# Altium PCB MainBoard_PCB.PcbDoc
Units mil, origin at the board's own origin, x right, y up, seen from the top; angles counter-clockwise.
Board outline 3040 x 1640 mil, 2 copper layers (Top Layer, Bottom Layer); 42 components, 30 nets, 152 pads, 1 vias.
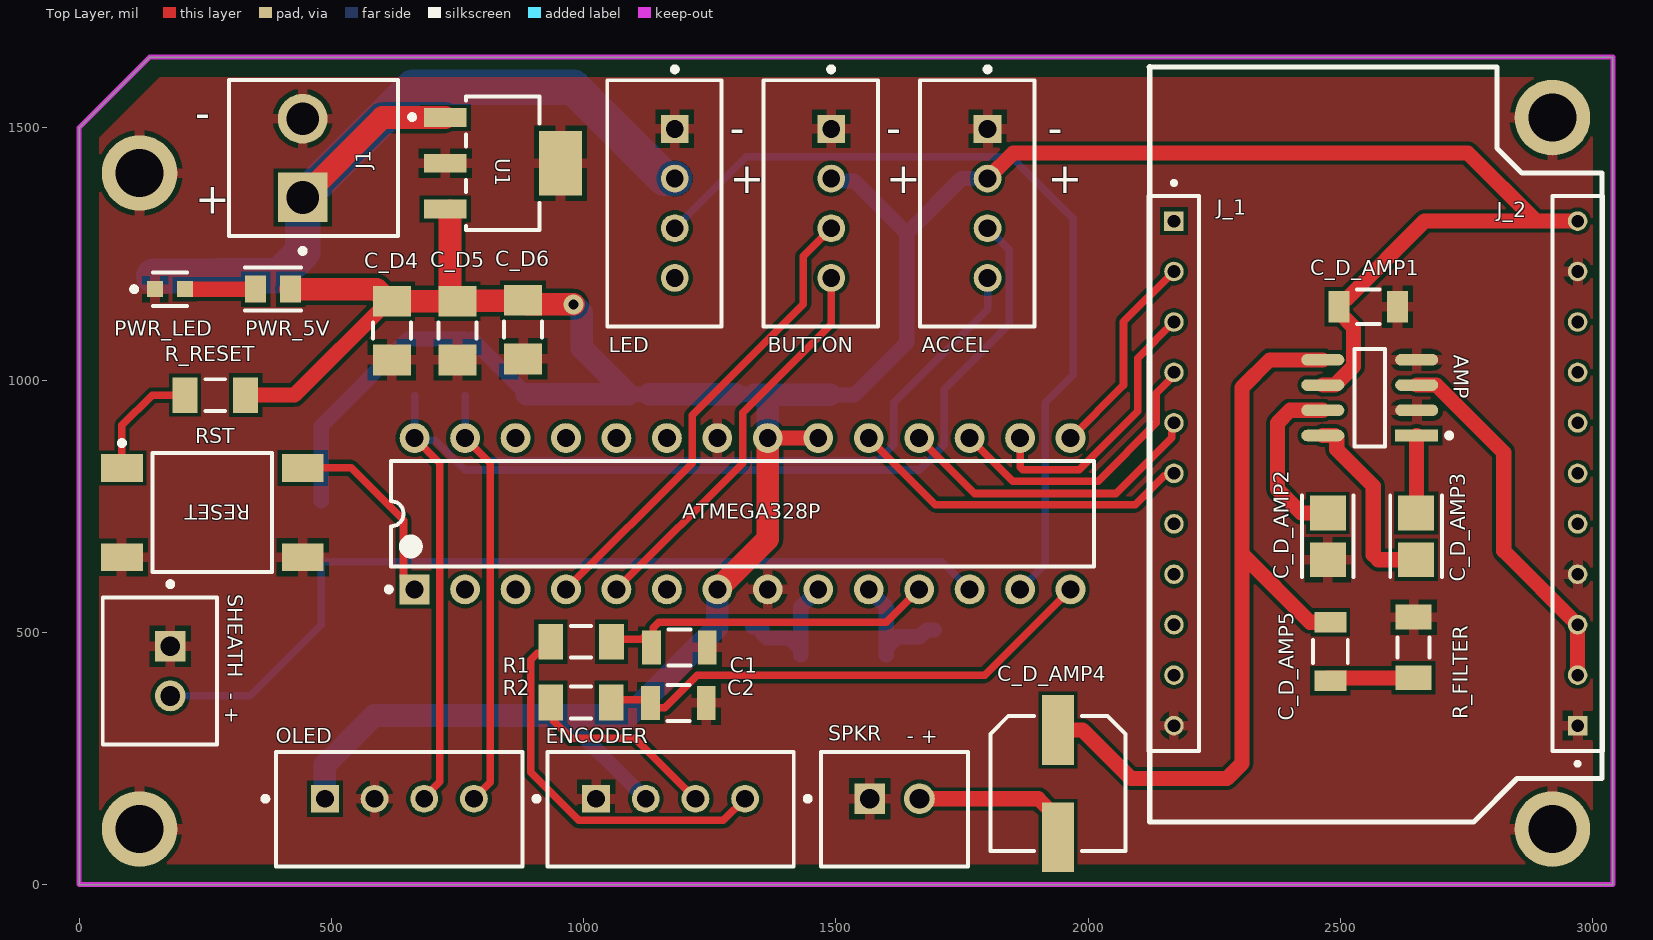
[diagram p0: Top Layer view]
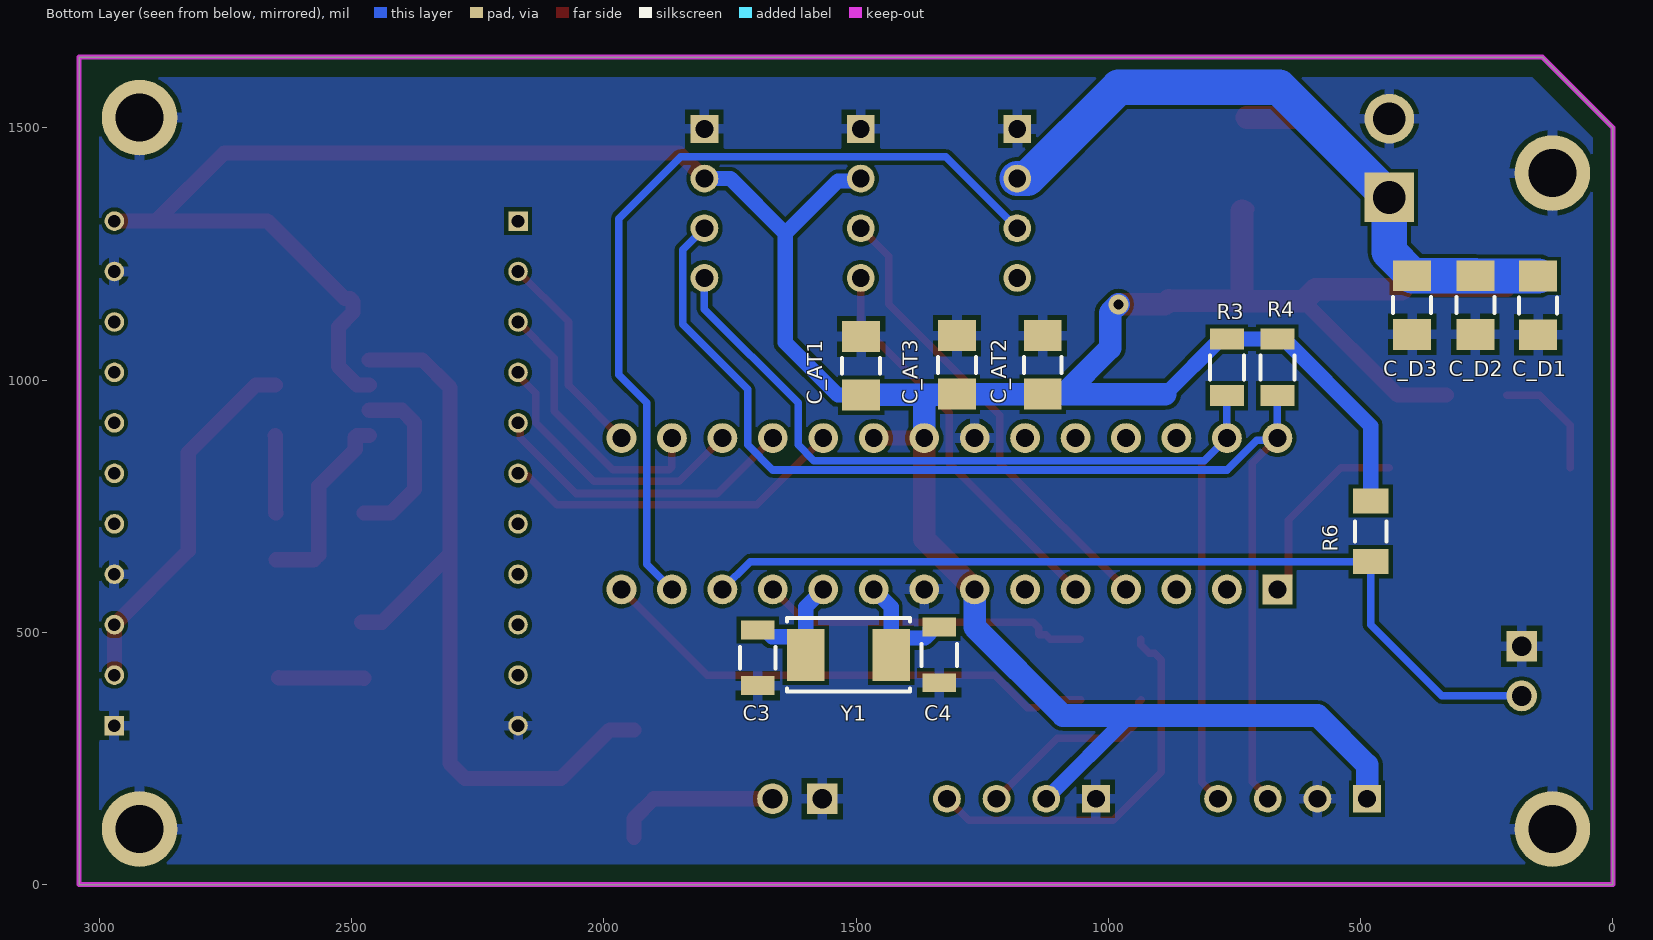
[diagram p1: Bottom Layer view, seen from below]
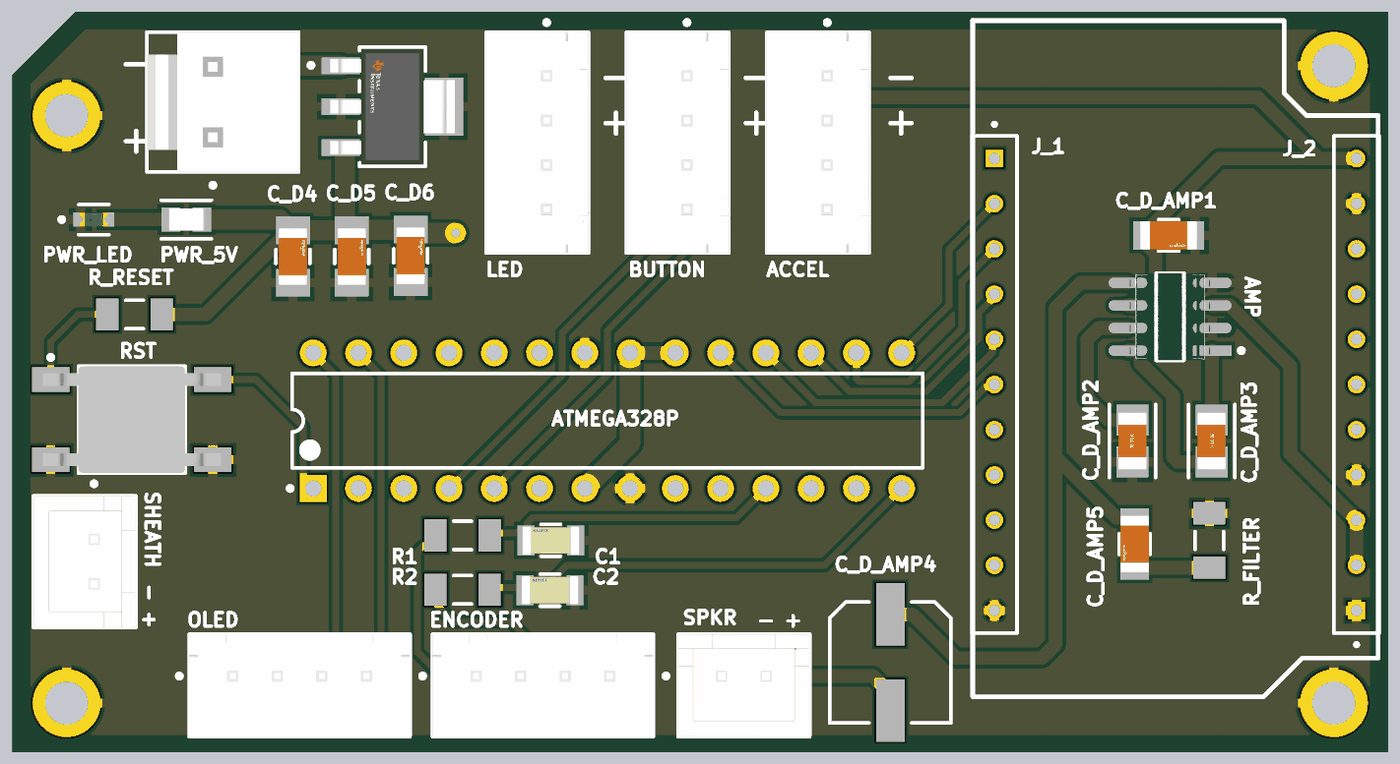
[diagram p2: 3D render of the assembled board from above, using the file's embedded part models]
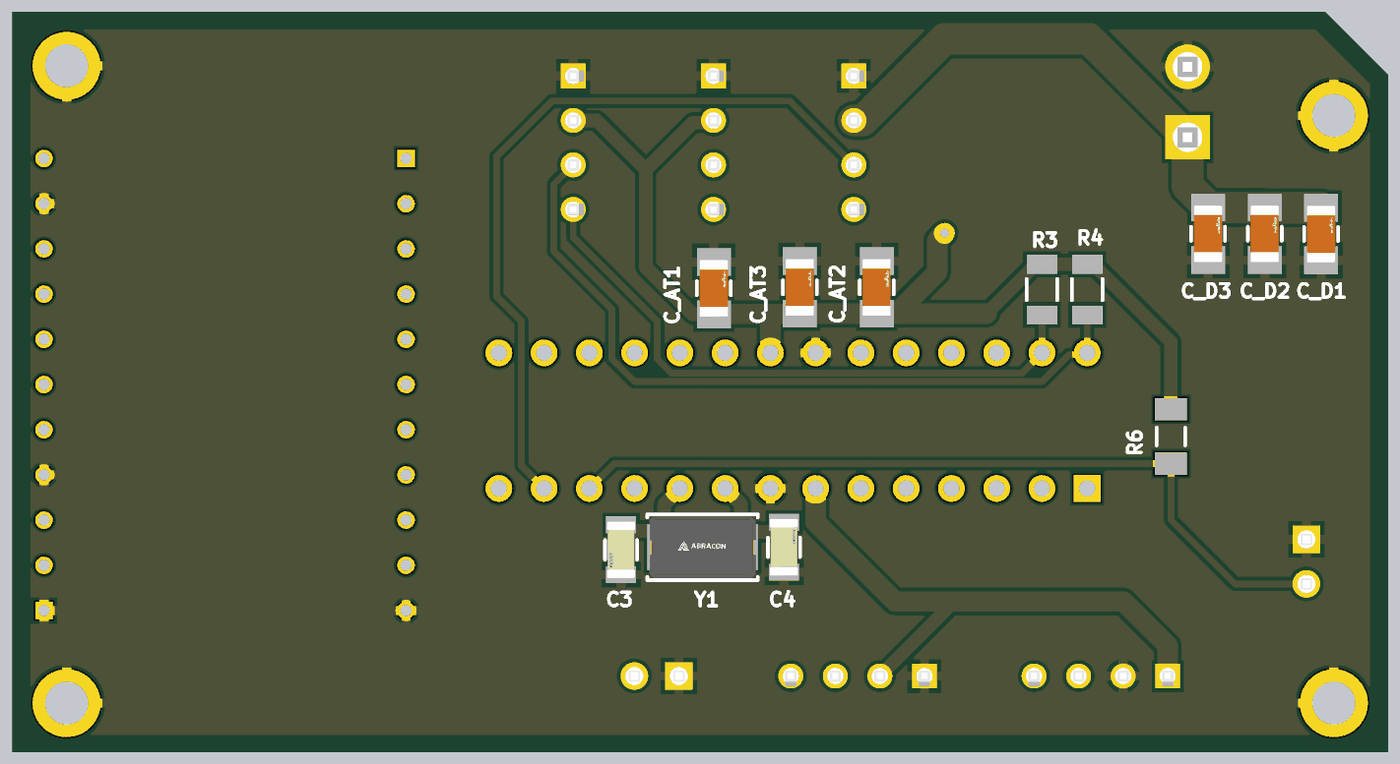
[diagram p3: 3D render of the assembled board from below, using the file's embedded part models]

## Layer stack, top to bottom
Top Solder: solder mask 0.4, Solder Resist, Dk 3.5
Top Layer: signal copper 1.4
Dielectric 1: dielectric 12.6, FR-4, Dk 4.8
Bottom Layer: signal copper 1.4
Bottom Solder: solder mask 0.4, Solder Resist, Dk 3.5

## Board outline
0,1500 140,1640 3040,1640 3040,0 0,0

## Design rules (kind name [scope] priority, off if disabled: settings)
BoardOutlineClearance [All] p1: gap=11.81 ignorepadtopadclearanceinfootprint=FALSE except(15.75: Arc-SplitBarrior Arc-SplitContinuation Track-SplitBarrior Track-SplitContinuation SMDPad-SplitBarrior SMDPad-SplitContinuation THPad-SplitBarrior THPad-SplitContinuation Via-SplitBarrior Via-SplitContinuation Fill-SplitBarrior Fill-SplitContinuation Poly-SplitBarrior Poly-SplitContinuation Region-SplitBarrior Region-SplitContinuation Text-SplitBarrior Text-SplitContinuation)
Clearance "Clearance Different Nets" [All] p1: gap=7.87 ignorepadtopadclearanceinfootprint=FALSE except(3.5: Arc-Arc Arc-Track Arc-SMDPad Track-Track Track-SMDPad; 5: SMDPad-SMDPad SMDPad-Via THPad-Via Via-Via; 10: Arc-Via Arc-Text Track-Via Track-Text SMDPad-Text THPad-Text Via-Text Fill-Text Poly-Text Region-Text Text-Text; 19.68: THPad-THPad Via-Hole)
Clearance "Clearance Same Nets" [All] p2: gap=7.87 ignorepadtopadclearanceinfootprint=FALSE except(3.5: Arc-Arc Arc-Track Arc-SMDPad Track-Track Track-SMDPad SMDPad-SMDPad; 5: SMDPad-Via THPad-Via; 10: Arc-Via Arc-Text Track-Via Track-Text SMDPad-Text THPad-Text Via-Via Via-Text Fill-Text Poly-Text Region-Text Text-Text)
Clearance "Clearance Bottom Layer" [OnLayer('Bottom Layer')] p3: gap=8 ignorepadtopadclearanceinfootprint=TRUE except(10: Arc-Text Track-Text SMDPad-Text THPad-Text Via-Text Fill-Text Poly-Text Region-Text Text-Text)
Clearance "Clearance Top Layer" [OnLayer('Top Layer')] p4: gap=8 ignorepadtopadclearanceinfootprint=TRUE except(10: Arc-Text Track-Text SMDPad-Text THPad-Text Via-Text Fill-Text Poly-Text Region-Text Text-Text)
HoleSize [All] p1: absolutevalues=TRUE maxlimit=248.03 minlimit=7.87 maxpercent=80.000 minpercent=20.000
MinimumAnnularRing [All] p1: minimumring=5.12
MinimumSolderMaskSliver [All] p1: minsoldermaskwidth=3.94
PolygonConnect PolygonConnect_1 [All] p1: thpad.connectstyle=Relief thpad.reliefconductorwidth=20 thpad.reliefentries=4 thpad.polygonreliefangle="90 Angle" thpad.airgapwidth=10 smdpad.connectstyle=Relief smdpad.reliefconductorwidth=20 smdpad.reliefentries=4 smdpad.polygonreliefangle="90 Angle" smdpad.airgapwidth=10 via.connectstyle=Direct via.reliefconductorwidth=20 via.reliefentries=4 via.polygonreliefangle="90 Angle" via.airgapwidth=10
RoutingCorners [All] p1: cornerstyle=Round minsetback=100 maxsetback=100
RoutingVias [All] p1: holewidth=19.68 width=39.37 viastyle="Through Hole" minholewidth=7.87 minwidth=13.78 maxholewidth=39.37 maxwidth=78.74
SilkToSilkClearance [All] p1: silktosilkclearance=3.94
SilkToSolderMaskClearance [IsPad] p1: minsilkscreentomaskgap=3.94 clearancetoexposedcopper=TRUE
SolderMaskExpansion [All] p1: expansion=4 istentingtop=FALSE
SupplyNets "Schematic Supply Nets_2" [InNet('GND')] p1: voltage=0.000
SupplyNets "Schematic Supply Nets_1" [InNet('VCC')] p2: voltage=0.000
SupplyNets "Schematic Supply Nets" [InNet('+5')] p3: voltage=0.000
Width [All] p1: maxlimit=100 minlimit=3.5 preferedwidth=15
25 further rules are at their usual default settings.

## Components (designator, comment, footprint, x,y, rotation, side; value= is the part's Value field where it differs from the comment)
ACCEL "B4B-XH-A(LF)(SN)" FP-B4B-XH-A_LF_SN-MFG 1780,1350 r90 top
AMP "LM386MX-1/NOPB" FP-D0008A-IPC_B 2558.06,965 r180 top
ATMEGA328P "ATmega328-PU" 28P3 1315,735 r90 top
BUTTON "B4B-XH-A(LF)(SN)" FP-B4B-XH-A_LF_SN-MFG 1470,1350 r90 top
C1 "C1206C103K5RACTU" FP-C1206C-EB-MFG 1189.88,470 r0 top value="10,000 pF"
C2 "C1206C103K5RACTU" FP-C1206C-EB-MFG 1187.92,359.99 r0 top value="10,000 pF"
C3 "C1206C220F1HACAUTO" FP-C1206C-EB-MFG 1695,449.4 r90 bottom value="22 pF"
C4 "C1206C220F1HACAUTO" FP-C1206C-EB-MFG 1335,455 r270 bottom value="22 pF"
C_AT1 "GRT31CR61H106KE01L" FP-GRT31C-0_2-IPC_A 1490,1028.1 r90 bottom
C_AT2 "GRM31CR71H105KA61L" FP-GRT31C-0_2-IPC_A 1130,1030 r90 bottom
C_AT3 "GRM31C5C1H104JA01K" FP-GRT31C-0_2-IPC_A 1300,1030 r90 bottom
C_D1 "GRT31CR61H106KE01L" FP-GRT31C-0_2-IPC_A 148.14,1147.87 r90 bottom
C_D2 "GRM31CR71H105KA61L" FP-GRT31C-0_2-IPC_A 272.55,1148.49 r90 bottom
C_D3 "GRM31C5C1H104JA01K" FP-GRT31C-0_2-IPC_A 397.88,1148.49 r90 bottom
C_D4 "GRT31CR61H106KE01L" FP-GRT31C-0_2-IPC_A 620,1098.1 r90 top
C_D5 "GRM31CR71H105KA61L" FP-GRT31C-0_2-IPC_A 750,1098.1 r90 top
C_D6 "GRM31C5C1H104JA01K" FP-GRT31C-0_2-IPC_A 880,1100 r90 top
C_D_AMP1 "12061C503JAT2A" FP-GRM319-0_15-MFG 2555,1145 r0 top
C_D_AMP2 "C3216X7R1C106K160AC" FP-C3216-160-0_2-IPC_B 2475,690 r90 top
C_D_AMP3 "C3216X7R1C106K160AC" FP-C3216-160-0_2-IPC_B 2650,690 r270 top
C_D_AMP4 "UUD1C221MCL1GS" NIC-CAPA2-6.3X7.7_V 1940,200 r270 top
C_D_AMP5 "12061C503JAT2A" FP-GRM319-0_15-MFG 2480,461.93 r270 top
ENCODER "B4B-XH-A(LF)(SN)" FP-B4B-XH-A_LF_SN-MFG 1172.36,149.33 r180 top
J1 "B2P-VH-B(LF)(SN)" FP-B2P-VH-B_LF_SN-MFG 464.84,1439.92 r90 top
J_1 "TS-111-T-A" SAMTEC_TS-111-T-A 2170,815 r270 top
J_2 "TS-111-T-A" SAMTEC_TS-111-T-A 2970,815 r90 top
LED "B4B-XH-A(LF)(SN)" FP-B4B-XH-A_LF_SN-MFG 1160,1350 r90 top
OLED "B4B-XH-A(LF)(SN)" FP-B4B-XH-A_LF_SN-MFG 634.8,149.33 r180 top
PWR_5V "CR0805-JW-331ELF" FP-CR0805-IPC_B 384.53,1180 r0 top
PWR_LED "LTST-C190GKT" FP-LTST-C190GKT-MFG 180,1180 r0 top
R1 "RC1206FR-0710KL" RESC3116X65X40ML10T20 994.85,360.89 r0 top
R2 "RC1206FR-0710KL" RESC3116X65X40ML10T20 994.97,481.12 r0 top
R3 "RC1206FR-074K7L" FP-RC1206-0_65-IPC_B 765,1025 r90 bottom
R4 "RC1206FR-074K7L" FP-RC1206-0_65-IPC_B 665,1025 r90 bottom
R6 "RC1206FR-0710KL" RESC3116X65X40ML10T20 480,700 r270 bottom
R_FILTER "RC1206FR-0710RL" RESC3116X65X40ML10T20 2645,470.04 r90 top
R_RESET "RC1206FR-0710KL" RESC3116X65X40ML10T20 270,970 r0 top
RESET "FSM4JSMATR" TECO-FSM4JSMATR_V 264.02,737.24 r90 top
SHEATH "B2B-XH-A(LF)(SN)" FP-B2B-XH-A_LF_SN-MFG 160.05,423.11 r270 top
SPKR "B2B-XH-A(LF)(SN)" FP-B2B-XH-A_LF_SN-MFG 1616.42,149.33 r0 top
U1 "LM7805MP/NOPB" FP-DCY0004A-MFG 840,1429.6 r0 top
Y1 "ABM7-16.000MHZ-D2Y-T" FP-ABM7-MFG 1515,455 r180 bottom

## Footprints (in the part's own frame and the unit in brackets; to place one, negate y for a bottom-side part, rotate by r counter-clockwise, add the part's x,y. Pads: shape width x height; smd on the part's side, far side on the other; paste and mask are expansions set on the pad)
28P3 [mm] "28-Pin Plastic Dual In-Line Package (PDIP)"
  rect 1.5x1.5 hole 0.9: 1(-3.81,16.51)
  round 1.5 hole 0.9: 2(-3.81,13.97) 3(-3.81,11.43) 4(-3.81,8.89) 5(-3.81,6.35) 6(-3.81,3.81) 7(-3.81,1.27) 8(-3.81,-1.27) 9(-3.81,-3.81) 10(-3.81,-6.35) 11(-3.81,-8.89) 12(-3.81,-11.43) 13(-3.81,-13.97) 14(-3.81,-16.51) 15(3.81,-16.51) 16(3.81,-13.97) 17(3.81,-11.43) 18(3.81,-8.89) 19(3.81,-6.35) 20(3.81,-3.81) 21(3.81,-1.27) 22(3.81,1.27) 23(3.81,3.81) 24(3.81,6.35) 25(3.81,8.89) 26(3.81,11.43) 27(3.81,13.97) 28(3.81,16.51)
  silkscreen extent -3.93,-17.7 2.65,17.93, body extent -3.6,-17.65 3.6,17.65, height 4.58
FP-ABM7-MFG [mm]
  rect 1.9x2.6 smd paste+0 mask+0: 1(-2.15,0) 2(2.15,0)
  silkscreen extent -3.1,-1.85 3.1,1.85, body extent -3,-1.75 3,1.75, height 1.4
FP-B2B-XH-A_LF_SN-MFG [mm]
  rect 1.55x1.55 hole 1 paste-2539.97 mask+0: 1(-1.25,0.525)
  round 1.55 hole 1 paste-2539.97 mask+0: 2(1.25,0.525)
  silkscreen extent -4.5,-2.88 3.7,2.88, body extent -3.8,-2.98 3.8,2.98, height 0.25
FP-B2P-VH-B_LF_SN-MFG [mm]
  rect 2.5x2.5 hole 1.65 paste-2539.97 mask+0: 1(-1.98,0.55)
  round 2.5 hole 1.65 paste-2539.97 mask+0: 2(1.98,0.55)
  silkscreen extent -4.8,-4.25 3.93,4.25, body extent -4.03,-4.35 4.03,4.35, height 0.25
FP-B4B-XH-A_LF_SN-MFG [mm]
  rect 1.4x1.4 hole 0.9 paste-2539.97 mask+0: 1(3.75,-0.525)
  round 1.4 hole 0.9 paste-2539.97 mask+0: 2(1.25,-0.525) 3(-1.25,-0.525) 4(-3.75,-0.525)
  silkscreen extent -6.2,-2.88 6.87,2.88, body extent -6.3,-2.98 6.3,2.98, height 0.25
FP-C1206C-EB-MFG [mm]
  rect 0.95x1.7 smd paste+0 mask+0: 1(-1.4,0) 2(1.4,0)
  silkscreen extent -0.55,-0.9 0.55,0.9, body extent -1.6,-0.8 1.6,0.8, height 0.88
FP-C3216-160-0_2-IPC_B [mil]
  rect 69.05x71.11 smd paste+0 mask+0: 1(-46.3,0) 2(46.3,0)
  silkscreen extent -81,-51 81,51, body extent -91,-45 91,45, height 10
FP-CR0805-IPC_B [mil]
  rect 41.66x53.63 smd paste+0 mask+0: 1(-34.53,0) 2(34.53,0)
  silkscreen extent -55,-43 55,43, body extent -65,-37 65,37, height 10
FP-D0008A-IPC_B [mil]
  rect 85.4x22.92 smd paste+0 mask+0: 1(-93.06,75)
  rrect100% 85.4x22.92 smd paste+0 mask+0: 2(-93.06,25) 3(-93.06,-25) 4(-93.06,-75) 5(93.06,-75) 6(93.06,-25) 7(93.06,25) 8(93.06,75)
  silkscreen extent -162,-97 31,97, body extent -146,-106 146,106, height 10
FP-DCY0004A-MFG [mm]
  rect 2.15x0.95 smd paste+0 mask+0: 1(-2.9,2.3) 2(-2.9,0) 3(-2.9,-2.3)
  rect 2.15x3.25 smd paste+0 mask+0: 4(2.9,0)
  silkscreen extent -4.7,-3.35 1.85,3.35, body extent -4.08,-3.45 4.08,3.45, height 0.25
FP-GRM319-0_15-MFG [mm]
  rect 1.05x1.6 smd paste+0 mask+0: 1(-1.475,0) 2(1.475,0)
  silkscreen extent -0.58,-0.87 0.58,0.87, body extent -2.1,-0.97 2.1,0.97, height 0.25
FP-GRT31C-0_2-IPC_A [mil]
  rect 61.21x75.05 smd paste+0 mask+0: 1(-58.1,0) 2(58.1,0)
  silkscreen extent -16,-38 16,38, body extent -63,-31 63,31, height 71
FP-LTST-C190GKT-MFG [mm]
  rect 0.8x0.8 smd paste+0 mask+0: 1(-0.75,0) 2(0.75,0)
  silkscreen extent -1.92,-0.85 0.85,0.85, body extent -1.25,-0.55 1.25,0.55, height 0.25
FP-RC1206-0_65-IPC_B [mil]
  rect 41.66x67.41 smd paste+0 mask+0: 1(-56.18,0) 2(56.18,0)
  silkscreen extent -24,-34 24,34
NIC-CAPA2-6.3X7.7_V [mm] "Aluminum Electrolytic Capacitor, Diameter 6.3mm, Height 8mm, Pitch 5.4mm"
  rect 3.5x1.6 smd: 1(-2.7,0) 2(2.7,0)
  silkscreen extent -3.4,-3.4 3.4,3.4, body extent -3.14,-3.12 3.14,3.15, height 8
RESC3116X65X40ML10T20 [mm] "Chip Resistor, 2-Leads, Body 3.10x1.60mm, IPC Low Density"
  rect 1.25x1.8 smd: 1(-1.525,0) 2(1.525,0)
  silkscreen extent -0.5,-0.8 0.5,0.8, body extent -1.6,-0.85 1.6,0.85, height 0.65
SAMTEC_TS-111-T-A [mm]
  rect 0.985x0.985 / inner round 0.985 / far side rect 0.985x0.985 hole 0.635: 01(-12.7,0)
  round 0.985 hole 0.635: 02(-10.16,0) 03(-7.62,0) 04(-5.08,0) 05(-2.54,0) 06(0,0) 07(2.54,0) 08(5.08,0) 09(7.62,0) 10(10.16,0) 11(12.7,0)
  silkscreen extent -14.72,-1.27 13.97,1.27
TECO-FSM4JSMATR_V [mm] "SMD, 4-Leads, Body 6x6mm, Pitch 4.5mm"
  rect 1.4x2.1 smd: 1(2.25,4.55) 2(2.25,-4.55) 3(-2.25,4.55) 4(-2.25,-4.55)
  silkscreen extent -3,-3 3.62,4.67, body extent -3,-5 3,5, height 5.08

## Part data
ACCEL BUTTON ENCODER LED OLED: library part CMP-17439-000250-1, "CONN HEADER VERT 4POS 2.5MM", Color=Natural, Contact Resistance=20mR, Current Rating=3A, Flammability Rating="UL94 V-0", Housing Color=White, Insulation Resistance=1GR, Max Operating Temperature=85°C, Max Voltage Rating (AC)=250V, Min Operating Temperature=-25°C, Package Quantity=500, Connector Type=Header, Contact Finish - Mating=TIN, Contact Material=Brass, Contact Plating=Tin, Contact Shape=Square, Contact Type="Male Pin", Depth=5.75mm, Fastening Type=Detent, Gender=Male, Housing Material=Polyamide, Insulation Color=Natural, Insulation Material=Nylon, Lead Free="Lead Free", Lead Pitch=2.5mm, Length=12.4mm, Mated Stacking Heights=9.8mm, Material=Polyamide, Max Current Rating=3A, Max Voltage Rating (DC)=250V, Mount="Through Hole", Number of Contacts=4, Number of Positions=4, Number of Rows=1, Orientation=Straight, Packaging=Bulk, Pitch=2.5mm, REACH SVHC="No SVHC", Series=XH, Termination=Solder, Voltage Rating=250V, Voltage Rating (AC)=250V, Wire/Cable Gauge=22AWG
AMP: library part CMP-0994-00003-2, "IC AMP CLASS AB MONO 325MW 8SOIC", Case/Package=D, Input Bias Current=250nA, Max Operating Temperature=70°C, Max Output Power=325mW, Max Power Dissipation=730mW, Max Supply Voltage=12V, Min Operating Temperature=0°C, Min Supply Voltage=4V, Nominal Supply Current=4mA, Operating Supply Voltage=9V, Package Quantity=2500, Power Supply Rejection Ratio (PSRR)=50dB, Voltage Gain=46dB, Bandwidth=300kHz, Contact Plating=Tin, Gain=20dB, Lead Free="Lead Free", Load Impedance=8R, Number of Channels=1, Number of Pins=8, Output Power=325mW, Packaging="Tape and Reel", Power Dissipation=730mW, Radiation Hardening=No, REACH SVHC="No SVHC", RoHS Compliant=Yes, Series=LM386, Supply Current=4mA, Supply Type=Single
ATMEGA328P: library part CMP-0095-00015-2, "8-bit AVR Microcontroller, 32KB Flash, 1KB EEPROM, 2KB SRAM, 28-pin PDIP, Industrial Grade (-40°C to 85°C)", ComponentLink1Description="Manufacturer URL", ComponentLink1URL=http://www.atmel.com/, ComponentLink2Description="ATmega48A/48PA/88A/88PA/168A/168PA/328/328P Datasheet", ComponentLink2URL=http://www.atmel.com/dyn/resources/prod_documents/8271.pdf, ComponentLink3Description="ATmega48A/48PA/88A/88PA/168A/168PA/328/328P Summary", ComponentLink3URL=http://www.atmel.com/dyn/resources/prod_documents/8271S.pdf, DatasheetVersion="revD, May-2011", PackageDescription="28-lead (0.300\"/7.62mm Wide) Plastic Dual Inline Package (PDIP)", PackageReference=28P3, PackageVersion="revB, Sep-2001", RevisionNote="DatasheetVersion updated. URLs added."
C1 C2: library part CMP-2000-06008-2, "CAP CER 10000PF 50V X7R 1206", Capacitance="10,000 pF", Manufacturer=KEMET, Package=C1206C-EB, Temperature="-55°C to +150°C", Temperature Characteristic=X7R, Temperature Coefficient=15%, Temperature Range High=+150°C, Temperature Range Low=-55°C, Tolerance=0.1, Voltage Rating="50 V", Automotive=Yes, Automotive Grade="Grade 0", Category=Cap, ComponentLink2Description=Datasheet, ComponentLink2URL=https://content.kemet.com/datasheets/KEM_C1007_X8R_ULTRA_150C_SMD.pdf, Device Class L1="Passive Components", Device Class L2=Capacitors, Device Class L3="Ceramic Capacitors", Digikey Description="CAP CER 10000PF 50V X7R 1206", Height=0.88mm, Ipc Land Pattern Name=CAPC320160X78, Lead Free=Yes, Manufacturer Part Number=C1206C103K5RACTU, Material=Ceramic, Mouser Description="Multilayer Ceramic Capacitors MLCC - SMD/SMT 50volts 10000pF X7R 10%", Octopart=https://octopart.com/c1206c103k5ractu-kemet-130245, RoHS=TRUE
C3 C4: library part CMP-03020-023717-1, "C1206 22 pF X8R 1.00% 100 V", Capacitance="22 pF", Manufacturer=KEMET, Package=C1206C-EB, Temperature="-55°C to +150°C", Temperature Characteristic=X8R, Temperature Coefficient=15%, Temperature Range High=+150°C, Temperature Range Low=-55°C, Tolerance=0.01, Voltage Rating="100 V", Automotive=Yes, Automotive Grade="Grade 0", Category=Cap, ComponentLink2Description=Datasheet, ComponentLink2URL=https://content.kemet.com/datasheets/KEM_C1007_X8R_ULTRA_150C_SMD.pdf, Device Class L1="Passive Components", Device Class L2=Capacitors, Device Class L3="Ceramic Capacitors", Height=0.88mm, Ipc Land Pattern Name=CAPC320160X78, Lead Free=Yes, Manufacturer Part Number=C1206C220F1HACAUTO, Material=Ceramic, Octopart=https://octopart.com/c1206c220f1hacauto-kemet-88102108, RoHS=TRUE
C_AT1 C_AT2 C_AT3 C_D1 C_D2 C_D3 C_D4 C_D5 C_D6: library part CMP-06035-000076-2, "Multi-Layer Ceramic Capacitor 10uF 50V X5R ±10% 1206 Emboss T/R", Capacitance=10uF, Case Code (Imperial)=1206, Case Code (Metric)=3216, Dielectric=X5R, Max Operating Temperature=85°C, Min Operating Temperature=-55°C, Ratings=AEC-Q200, Tolerance=10%, Voltage Rating=50V, Case/Package=1206, Length=0.126inch, Mount="Surface Mount", Packaging="Cut Tape", Thickness=0.071inch, Voltage Rating (DC)=50V, Width=0.063inch
C_D_AMP1: library part CMP-06035-028588-1, "Chip Multilayer Ceramic Capacitors for General Purpose, 1206, 0.05uF, C0G, 30ppm/°C, 5%, 50V"
C_D_AMP2 C_D_AMP3: library part CMP-08246-002980-1, "Multilayer Ceramic Capacitors 10uF ±10% 16V X7R SMD 1206", Capacitance=10uF, Case Code (Imperial)=1206, Case Code (Metric)=3216, Dielectric=X7R, Dielectric Material=Ceramic, Max Operating Temperature=125°C, Min Operating Temperature=-55°C, Package Quantity=1, Tolerance=10%, Voltage=16V, Case/Package=1206, Construction=Flat, Depth=1.6mm, Height=1.6mm, Lead Free="Lead Free", Length=3.2mm, Mount="Surface Mount", Number of Pins=2, Packaging="Tape and Reel", REACH SVHC="No SVHC", Resistor Type=Ceramic, RoHS Compliant=Yes, Series=C, Termination=SMD/SMT, Thickness=0.071inch, Voltage Rating=16V, Voltage Rating (DC)=16V, Weight=0.000571oz, Width=0.063inch
C_D_AMP4: library part CMP-0687-00060-1, "Aluminum Electrolytic Capacitor, UD Series, Low Impedance, 220 uF, 16 V, + / - 20%, -55 to 105 degC, Chip Type, 6.3 x 7.7 mm D x L, Pb-Free, Reel", Manufacturer=Nichicon, Rated Capacitance="220 uF", Rated Ripple Current (at 100kHz)="280 mA", Rated Voltage="16 V", Tolerance Rated Capacitance="-20 to 20%", ComponentLink1Description="Manufacturer URL", ComponentLink1URL=http://www.nichicon.co.jp/, ComponentLink2Description=Datasheet, ComponentLink2URL=http://products.nichicon.co.jp/en/pdf/XJA043/e-ud.pdf, ComponentLink3Description="Package Specification", ComponentLink3URL=http://products.nichicon.co.jp/en/pdf/XJA043/e-ud.pdf, DatasheetVersion=08/2012, Diameter="6.3 mm", Endurance Time="2000 h", Impedance="0.34 Ohm", Length="7.7 mm", Mounting Technology="Surface Mount", PackageDescription="2-Pin Surface Mount Device, Diameter 6.3 mm, Height 7.7 mm, Pitch 5.4 mm", PackageReference=CAPAE-D6.3H7.7, Packing="Dia382mm Reel", PartNumber=UUD1C221MCL1GS, RoHS=TRUE
C_D_AMP5: library part CMP-06035-028588-1, "Chip Multilayer Ceramic Capacitors for General Purpose, 1206, 0.10uF, C0G, 30ppm/°C, 5%, 50V"
J1: library part CMP-17439-000297-1, "CONN HEADER VERT 2POS 3.96MM", Color=Natural, Flammability Rating="UL94 V-0", Voltage Rating=250V, Connector Type=Header, Contact Finish - Mating=TIN, Contact Material=Brass, Contact Mating Length=0.303inch, Contact Plating=Tin, Contact Shape=Square, Contact Type="Male Pin", Fastening Type=Friction, Insulation Color=Natural, Insulation Material=PBT, Lead Free="Lead Free", Mount="Through Hole", Number of Positions=2, Number of Rows=1, Packaging=Bulk, Pitch=0.156inch, Series=VH, Termination=Solder
J_1 J_2: Package=None, Availability=Unavailable, MF="{'manufacturer': u'Samtec Inc.'}", MP=TS-111-T-A, Price=None
PWR_5V: library part CMP-07231-005909-1, "Thick Film Chip Resistors 0805 330Ω 0.125W 5% 200ppm/°C", Case Code (Imperial)=0805, Case Code (Metric)=2012, Max Operating Temperature=155°C, Max Power Dissipation=125mW, Min Operating Temperature=-55°C, Package Quantity=1, Resistance=330R, Temperature Coefficient=200ppm/°C, Tolerance=5%, Voltage Rating=150V, Case/Package=0805, Composition="Thick Film", Contact Plating=Tin, Depth=1.25mm, Features="Moisture Resistant", Height=0.024inch, Length=2mm, Military Standard=Not, Mount="Surface Mount", Number of Pins=2, Number of Terminations=2, Packaging="Tape and Reel", Power Rating=125mW, Radiation Hardening=No, REACH SVHC="No SVHC", Termination=SMD/SMT, Thickness=508um, Voltage Rating (DC)=150V, Width=0.049inch
PWR_LED: library part CMP-22017-000005-2, "LED GREEN CLEAR CHIP SMD", Case Code (Imperial)=0603, Case Code (Metric)=1608, Color=Green, Forward Current=30mA, Forward Voltage=2.1V, Lens Color=Colorless, Max Operating Temperature=85°C, Min Operating Temperature=-55°C, Package Quantity=1, Power Dissipation=100mW, Reverse Voltage=5V, Test Current=10mA, Voltage=2V, Case/Package=0603, Depth=0.8mm, Dominant Wavelength=569nm, Height=0.8mm, Illumination Color=Green, Lead Free="Lead Free", Length=1.6mm, Lens Style=Clear, Lens Transparency=Clear, Luminous Intensity=6mcd, Mount="Surface Mount", Number of Elements=1, Number of LEDs=1, Number of Pins=2, Packaging="Tape and Reel", Power Rating=100mW, Radiation Hardening=No, Viewing Angle=130°, Wavelength=565nm, Width=0.8mm
R1 R2 R6 R_RESET: library part CMP-1014-00623-2, "Chip Resistor, 10 KOhm, +/- 1%, 0.25 W, -55 to 155 degC, 1206 (3216 Metric), RoHS, Tape and Reel", Case Code (Imperial)=1206, Case Code (Metric)=3216, Manufacturer=Yageo, Max Operating Temperature=155degC, Min Operating Temperature=-55degC, Package Description="2-Pin Surface Mount Device, Body 3.1 x 1.6 mm", Package Quantity=5000, Package Reference=1206.0, Power Rating=250mW, Resistance=10KOhm, Temperature Coefficient=100ppm/degreesC, Tolerance=1%, Voltage Rating=200V, Case/Package=1206, Composition=ThickFilm, Datasheet URL=http://www.yageo.com/NewPortal/yageodocoutput?fileName=/pdf/R-Chip/PYu-RC_Group_51_RoHS_L_5.pdf, Datasheet Version="Rev. 5, 10/2016", Depth=1.6mm, Height=0.55mm, Lead Free=LeadFree, Length=3.1mm, Manufacturer URL=http://www.yageo.com/, Military Standard=Not, Packaging=TapeandReel, REACH SVHC=Unknown, RoHSCompliant=true, Termination=SMD/SMT, Width=1.6mm
R3 R4: library part CMP-03412-037805-1, "RES SMD 4.7K OHM 1% 1/4W 1206", Case Code (Imperial)=1206, Case Code (Metric)=3216, Max Operating Temperature=155°C, Max Power Dissipation=250mW, Min Operating Temperature=-55°C, Package Quantity=1, Resistance=4.7kR, Resistance Tolerance=1%, Resistor Type="Thick Film", Temperature Coefficient=100ppm/°C, Voltage Rating=200V, Case/Package=1206, Construction=Rectangular, Depth=1.6mm, Features="Moisture Resistant", Height=0.026inch, Lead Free="Lead Free", Length=0.122inch, Military Standard=Not, Number of Pins=2, Number of Terminations=2, Packaging="Tape and Reel", Power Rating=250mW, RoHS Compliant=Yes, Series=RC, Size Code=1206, Termination=SMD/SMT, Tolerance=1%, Voltage Rating (DC)=200V, Width=0.063inch
R_FILTER: library part CMP-2100-03677-1, "Chip Resistor, 10 Ohm, +/- 1%, 0.25 W, -55 to 155 degC, 1206 (3216 Metric), RoHS, Tape and Reel", Case Code (Imperial)=1206, Case Code (Metric)=3216, Manufacturer=Yageo, Max Operating Temperature=155degC, Max Power Dissipation=250mW, Min Operating Temperature=-55degC, Package Description="2-Pin Surface Mount Device, Body 3.1 x 1.6 mm", Package Quantity=1, Package Reference=1206.0, Resistance=10Ohm, Temperature Coefficient=200ppm/degreesC, Tolerance=1%, Voltage Rating=200V, Case/Package=1206, Composition=ThickFilm, Datasheet URL=http://www.yageo.com/NewPortal/yageodocoutput?fileName=/pdf/R-Chip/PYu-RC_Group_51_RoHS_L_5.pdf, Datasheet Version="Rev. 5, 10/2016", Depth=1.6mm, Height=0.026inch, Lead Free=LeadFree, Length=3.1mm, Manufacturer URL=http://www.yageo.com/, Military Standard=Not, Number of Pins=2, Number of Terminations=2, Packaging=TapeandReel, Power Rating=250mW, REACH SVHC=Unknown, RoHSCompliant=true, Termination=SMD/SMT, Voltage Rating (DC)=200V, Width=0.063inch
RESET: library part CMP-2000-07486-1, "Micro Miniature Push Button Switch FSM JSM, 50 mA, -35 to 85 degC, 4-Pin SMD, RoHS, Tape and Reel", Capacitance=0f, Case\/Package=SMD/SMT, Contact Current Rating=50mA, Contact Resistance=100mOhm, Manufacturer="TE Connectivity", Max Operating Temperature=85degC, Max Voltage Rating (DC)=12V, Min Operating Temperature=-35degC, Operating Force=160gf, Package Description="4-Pin Surface Mount Device, Body 6 x 6 mm, Pitch 4.5 mm", Package Quantity=1200, Voltage Rating (DC)=24V, Actuator Length=0.055inch, Actuator Material=Polyamide, Contact Material=CopperAlloy, Contact Plating=Silver, Current Rating=50mA, Datasheet URL=http://www.te.com/commerce/DocumentDelivery/DDEController?Action=showdoc&DocId=Customer+Drawing%7F2-1437565-7%7FV%7Fpdf%7FEnglish%7FENG_CD_2-1437565-7_V.pdf%7F4-1437565-2, Datasheet Version="Rev. V, 02/2015", Electrical Life=100000Cycles, Illumination Type=Illuminated, Manufacturer URL=http://www.te.com/, Mechanical Life=100000Cycles, Mount=SurfaceMount, Mounting Technology=SurfaceMount, Orientation=Straight, Package Reference=FSM4JSMATR, Packaging=TapeandReel, REACH SVHC=Unknown, RoHSCompliant=true, Switch Travel=0.25mm, Termination=GullWing, Throw Configuration=SPST
SHEATH SPKR: library part CMP-2000-05888-3, "CONN HEADER VERT 2POS 2.5MM", Color=Natural, Contact Resistance=20mR, Current Rating=3A, Housing Color=White, Insulation Resistance=1GR, Max Operating Temperature=85°C, Max Voltage Rating (AC)=250V, Min Operating Temperature=-25°C, Connector Type="Male Pin", Contact Material=Brass, Contact Plating=Tin, Contact Type="Male Pin", Depth=5.75mm, Fastening Type=Detent, Housing Material=Polyamide, Lead Free="Lead Free", Lead Pitch=2.5mm, Length=7.4mm, Max Current Rating=3A, Max Voltage Rating (DC)=250V, Mount="Through Hole", Number of Contacts=2, Number of Positions=2, Number of Rows=1, Orientation=Straight, Packaging=Bulk, Pitch=2.5mm, REACH SVHC="No SVHC", Series=XH, Termination=Solder, Voltage Rating=250V, Voltage Rating (AC)=250V, Wire/Cable Gauge=22AWG
U1: library part CMP-04917-000007-1, "IC REG LINEAR 5V 1.5A SOT223-4", Dropout Voltage=2V, Manufacturer="Texas Instruments", Max Junction Temp=+150°C, Max Supply Voltage=30V, Min Supply Voltage=7.5V, Nominal Supply Current=8mA, Output Current=1.5A, Output Voltage=5V, Package=DCY0004A, Temperature="0°C to +125°C", Temperature Range High=+125°C, Temperature Range Low=0°C, Accuracy Percentage=3%, Automotive=No, Category=IC, ComponentLink2Description=Datasheet, ComponentLink2URL=http://www.ti.com/lit/ds/symlink/lm7800.pdf, Device Class L1="Integrated Circuits (ICs)", Device Class L2="Power Management ICs", Device Class L3="Voltage Regulators - Linear", Digikey Description="IC REG LINEAR 5V 1.5A SOT223-4", Height=1.8mm, Lead Free=Yes, Manufacturer Part Number=LM7805MP/NOPB, Number of Outputs=1, Octopart=https://octopart.com/lm7805mp%2Fnopb-texas+instruments-74629991, Output Type=Fixed, RoHS=TRUE, Standoff Height=0.02mm
Y1: library part CMP-27762-000095-1, "Crystal 16MHz ±20ppm 18pF SMD-2 6mm x 3.5mm", Case/Package=CSMD, ESR (Equivalent Series Resistance)=50R, Frequency=16MHz, Frequency Stability=30ppm, Frequency Tolerance=20ppm, Load Capacitance=18pF, Max Operating Temperature=85°C, Min Operating Temperature=-40°C, Operating Frequency="16 MHz", Package Quantity=1000, Resistor Type=Ceramic, Depth=3.5mm, Height=0.055inch, Lead Free="Lead Free", Length=6mm, Mount="Surface Mount", Number of Pins=2, Packaging="Tape and Reel", Radiation Hardening=No, Series=ABM7, Termination=SMD/SMT, Tolerance=20ppm, Width=3.3mm

## Free pads (board coordinates)
  round 150 hole 94.88: 8(120,1410) 9(2920,110) 10(120,110) 11(2920,1520)

## Via types
v1: diameter 39.37, hole 19.68, Top Layer to Bottom Layer, 1 vias

## Nets (pads, with @x,y where several pads share a name; then routed paths per layer and width w, separated by ;. In a path a pad name is that pad's centre, name@x,y a point inside that pad or via, vN(x,y) a via of type N, cw(c..) or ccw(c..) an arc to the next point about the centre after c; other vN are vias at no path point)
+5: ACCEL.2 AMP.6 ATMEGA328P.7 ATMEGA328P.20 ATMEGA328P.21 BUTTON.2 C_AT1.1 C_AT2.1 C_AT3.1 C_D4.2 C_D5.2 C_D6.2 C_D_AMP1.1 ENCODER.2 J_2.11 OLED.1 PWR_5V.2 R3.2 R4.2 R6.1 R_RESET.2 U1.3 | length 7150.6
  Top Layer w30: R_RESET.2 426.88,970 613.08,1156.2 C_D4.2 ; U1.3 731.3,1339.05 U1.3@735,1335.35 ; C_D5.2@735,1171.2 C_D5.2 C_D5.2@750.95,1157.15 ; ATMEGA328P.21 ATMEGA328P.20 ; ACCEL.2 1851.46,1450 2752.34,1450 2887.34,1315 ; AMP.6 2489.16,990 2526.2,1027.04 2526.2,1104.9 2496.93,1134.17 C_D_AMP1.1 2496.93,1155.83 2502.6,1161.5 2513.43,1161.5 2666.93,1315 2887.34,1315 ; J_2.11 2887.34,1315
  Top Layer w45: PWR_5V.2 589.28,1180 C_D4.2@613.08,1156.2 ; C_D4.2 C_D5.2 ; C_D5.2@735,1171.2 U1.3@735,1335.35 ; C_D5.2@750.95,1157.15 C_D6.2@879.05,1157.15 ; C_D6.2 888.1,1150 v1(980,1150) ; ATMEGA328P.7 1365,685 ATMEGA328P.21
  Bottom Layer w30: R6.1 480,909.05 652.13,1081.18 R4.2 R3.2 ; R3.2@777.87,1081.18 887.16,971.9 ; 958.15,335 ENCODER.2 ; 1088.1,971.9 C_AT2.1 ; C_AT3.1 1338.1,971.9 1339.05,970.95 1365,945 ; C_AT1.1@1489.05,970.95 C_AT1.1 1536.21,970 1640.31,1074.1 1640.31,1290.31 ; BUTTON.2 1495.48,1394.41 1536.21,1394.41 1640.31,1290.31 ; ACCEL.2 1749.21,1399.21 1640.31,1290.31
  Bottom Layer w45: OLED.1 487.17,237.17 585,335 958.15,335 1090,335 1265,510 ATMEGA328P.7 ; 887.16,971.9 1088.1,971.9 996.48,1063.52 996.48,1133.52 v1(980,1150) ; C_AT2.1 C_AT3.1 ; 1339.05,970.95 C_AT1.1@1489.05,970.95 ; ATMEGA328P.21 1365,945
GND: ACCEL.1 AMP.2 AMP.4 ATMEGA328P.8 ATMEGA328P.22 BUTTON.1 C1.2 C2.2 C3.1 C4.2 C_AT1.2 C_AT2.2 C_AT3.2 C_D1.1 C_D2.1 C_D3.1 C_D4.1 C_D5.1 C_D6.1 C_D_AMP1.2 C_D_AMP2.1 ENCODER.1 J1.2 J_1.11 J_2.01 J_2.04 J_2.10 LED.1 OLED.2 pad.8 pad.9 pad.10 pad.11 PWR_LED.1 R_FILTER.2 RESET.3 RESET.4 SHEATH.1 SPKR.1 U1.2 U1.4
NetACCEL_3: ACCEL.3 ATMEGA328P.28 OLED.3 R4.1 | length 2429.6
  Top Layer w15: ATMEGA328P.28 715,835 715,203.74 684.02,172.76 OLED.3
  Bottom Layer w15: R4.1 ATMEGA328P.28 669.03,880.97 705.53,880.97 764.9,821.6 1665.1,821.6 1715,871.5 1715,981.52 1843.6,1110.12 1843.6,1257.85 ACCEL.3
NetACCEL_4: ACCEL.4 ATMEGA328P.27 OLED.4 R3.1 | length 2122.4
  Top Layer w15: ATMEGA328P.27 815,835 815,202.56 OLED.4
  Bottom Layer w15: R3.1 ATMEGA328P.27 809.9,840.1 1583.6,840.1 1615,871.5 1615,955 1800.67,1140.67 ACCEL.4
NetAMP_1: AMP.1 C_D_AMP3.1 | length 154.2
  Top Layer w30: C_D_AMP3.1 2650.56,736.86 2650.56,889.44 AMP.1
NetAMP_3: AMP.3 J_2.02 J_2.03 | length 729.9
  Top Layer w30: AMP.3 2690,990 2823.57,856.43 2823.57,661.43 J_2.03 J_2.02
NetAMP_5: AMP.5 C_D_AMP4.1 C_D_AMP5.1 | length 1575.9
  Top Layer w30: C_D_AMP4.1 1988.7,306.3 2085,210 2275,210 2305,240 2305,654.82 ; AMP.5 2360,1040 2305,985 2305,654.82 ; C_D_AMP5.1 2439.82,520 2305,654.82
NetAMP_7: AMP.7 C_D_AMP2.2 | length 351.4
  Top Layer w30: AMP.7 2400,940 2375,915 2375,783.5 2422.2,736.3 C_D_AMP2.2
NetAMP_8: AMP.8 C_D_AMP3.2 | length 381.1
  Top Layer w30: AMP.8 2489.16,890 2492.7,886.46 2492.7,862.3 2565,790 2565,653.51 2574.81,643.7 C_D_AMP3.2
NetATMEGA328P_1: ATMEGA328P.1 RESET.2 | length 389
  Top Layer w15: RESET.2 539.17,825.83 642.97,722.03 642.97,607.03 ATMEGA328P.1
NetATMEGA328P_4: ATMEGA328P.4 BUTTON.3 | length 933.5
  Top Layer w15: ATMEGA328P.4 1215,835 1215,930 1435,1150 1435,1245.12 BUTTON.3
NetATMEGA328P_5: ATMEGA328P.5 BUTTON.4 | length 793.7
  Top Layer w15: ATMEGA328P.5 1315,835 1315,935 1490.67,1110.67 BUTTON.4
NetATMEGA328P_9: ATMEGA328P.9 C4.1 Y1.2 | length 273.8
  Bottom Layer w30: C4.1 1349.76,510.12 1353.46,506.42 1353.46,498.39 1363.28,488.58 1407.95,488.58 1430.35,466.18 Y1.2 1430.35,550.35 ATMEGA328P.9
NetATMEGA328P_10: ATMEGA328P.10 C3.2 Y1.1 | length 254.5
  Bottom Layer w30: ATMEGA328P.10 1599.65,550.35 Y1.1 ; Y1.1@1599.65,468.78 1622.05,491.18 1666.9,491.18 1680.24,504.52 C3.2
NetATMEGA328P_11: ATMEGA328P.11 C1.1 R2.2 | length 657.3
  Top Layer w15: R2.2@1056.2,486.35 1115,486.35 1124.09,495.44 1137.17,495.44 1137.69,495.96 1137.69,509.05 1148.65,520 1600,520 ATMEGA328P.11
NetATMEGA328P_12: ATMEGA328P.12 R6.2 SHEATH.2 | length 1790.5
  Bottom Layer w15: SHEATH.2 338.9,373.9 480,515 R6.2 1710.04,639.96 ATMEGA328P.12
NetATMEGA328P_13: ATMEGA328P.13 LED.3 | length 1677
  Bottom Layer w15: LED.3 1322.03,1442.15 1847.85,1442.15 1970,1320 1970,1010 1915,955 1915,635 ATMEGA328P.13
NetATMEGA328P_14: ATMEGA328P.14 C2.1 R1.2 | length 1012.1
  Top Layer w15: R1.2@1054.89,366.12 1131.53,366.12 C2.1@1132.8,364.85 ; C2.1 1142.79,350 1160.47,350 1225.47,415 1795,415 ATMEGA328P.14
NetATMEGA328P_15: ATMEGA328P.15 J_1.02 | length 414.9
  Top Layer w15: ATMEGA328P.15 2070,990 2070,1115 J_1.02
NetATMEGA328P_16: ATMEGA328P.16 J_1.03 | length 547.7
  Top Layer w15: ATMEGA328P.16 1865,827.42 1870.42,822 1982,822 2098,938 2098,1043 J_1.03
NetATMEGA328P_17: ATMEGA328P.17 J_1.04 | length 567.8
  Top Layer w15: ATMEGA328P.17 1850.5,799.5 2019.5,799.5 2135.24,915.24 2135.24,973.8 2170,1008.57 J_1.04
NetATMEGA328P_18: ATMEGA328P.18 J_1.05 | length 623.2
  Top Layer w15: ATMEGA328P.18 1775,775 2055,775 2165.76,885.76 2165.76,910.76 J_1.05
NetATMEGA328P_19: ATMEGA328P.19 J_1.06 | length 685.4
  Top Layer w15: ATMEGA328P.19 1697,753 2093,753 2150.45,810.45 2165.45,810.45 J_1.06
NetC_D_AMP4_2: C_D_AMP4.2 SPKR.2 | length 327.9
  Top Layer w30: SPKR.2 1901.1,170 1940,131.1 C_D_AMP4.2
NetC_D_AMP5_2: C_D_AMP5.2 R_FILTER.1 | length 170.5
  Top Layer w30: C_D_AMP5.2@2475,408.86 2475.57,409.43 2644.43,409.43 R_FILTER.1
NetENCODER_3: ENCODER.3 R1.1 | length 389.1
  Top Layer w15: R1.1@934.77,366.12 939.9,360.99 939.9,325.1 975,290 1101.57,290 ENCODER.3
NetENCODER_4: ENCODER.4 R2.1 | length 769.3
  Top Layer w15: R2.1@936.12,486.35 936.12,475.53 919.02,458.42 908.19,458.42 895,445.23 895,222.86 990.8,127.07 1277.07,127.07 ENCODER.4
NetPWR_5V_1: PWR_5V.1 PWR_LED.2 | length 140.5
  Top Layer w30: PWR_LED.2 PWR_5V.1
NetR_RESET_1: R_RESET.1 RESET.1 | length 234
  Top Layer w15: RESET.1 84.89,909.89 145,970 R_RESET.1
VCC: C_D1.2 C_D2.2 C_D3.2 J1.1 LED.2 U1.1 | length 1675
  Top Layer w45: J1.1 601.37,1520.15 U1.1
  Bottom Layer w70: C_D1.2 148.44,1206.28 272.25,1206.28 C_D2.2 C_D3.2 397.88,1208.47 443.19,1253.78 J1.1 661.22,1580 980,1580 1160.79,1399.21 LED.2
pads on no net: ATMEGA328P.2 ATMEGA328P.3 ATMEGA328P.6 ATMEGA328P.23 ATMEGA328P.24 ATMEGA328P.25 ATMEGA328P.26 J_1.01 J_1.07 J_1.08 J_1.09 J_1.10 J_2.05 J_2.06 J_2.07 J_2.08 J_2.09 LED.4

## Polygon pours and split planes (outlines as drawn)
GND on Top Layer "GND_L01_P001" (solid, pour order 1): 160,1600 40,1480 40,40 3000,40 3000,1600
GND on Bottom Layer "GND_L02_P002" (solid, pour order 2): 3000,1600 160,1600 40,1480 40,40 3000,40

## Keep-outs
Keep-Out Layer:
  the board outline again, w10

## Silkscreen, mask and mechanical layers (free items; w line width, h text height)
Top Overlay:
  lines w10: 2122,124 2764,124 2850,210 3018,210 3018,1327 3018,1410 2860,1410 2810,1460 2810,1620 2675,1620 2121,1620 2122,1621 2122,125
  text "-" at 230,1500.01 h60
  text "-" at 1290,1470.01 h60
  text "-" at 1600,1470.01 h60
  text "-" at 1920,1470.01 h60
  text "+" at 1290,1370 h60
  text "+" at 1600,1370 h60
  text "+" at 1920,1370 h60
  text "+" at 230,1330 h60
  text "RST" at 230,875 h30
  text "- +" at 290,380 h30 r270
  text "- +" at 1640,280 h30